# Altium PCB opo8001.PcbDoc
Units mil, origin at the board's own origin, x right, y up, seen from the top; angles counter-clockwise.
Board outline 1424 x 1040 mil, 6 copper layers (Top Layer, Ground Plane, Signal Layer 1, Signal Layer 2, Power Plane, Bottom Layer), stack 57.617 mil thick; 112 components, 83 nets, 429 pads, 145 vias.
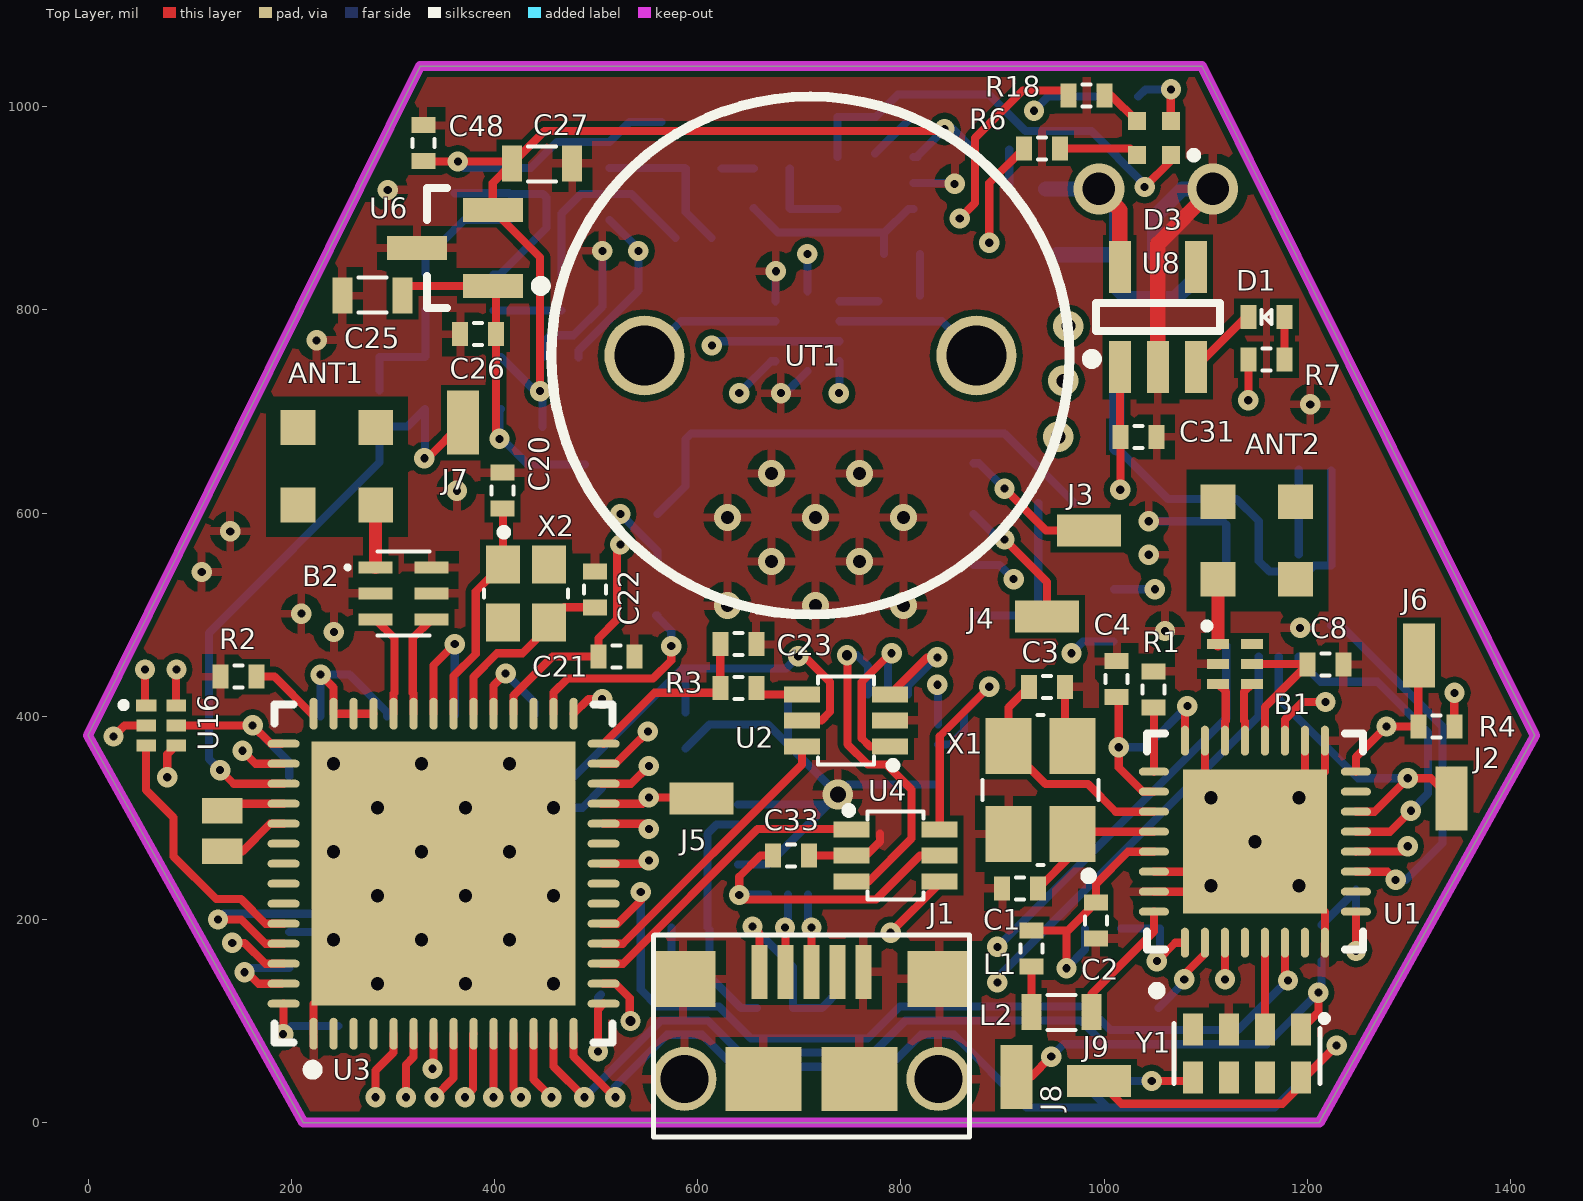
[diagram p0: Top Layer view]
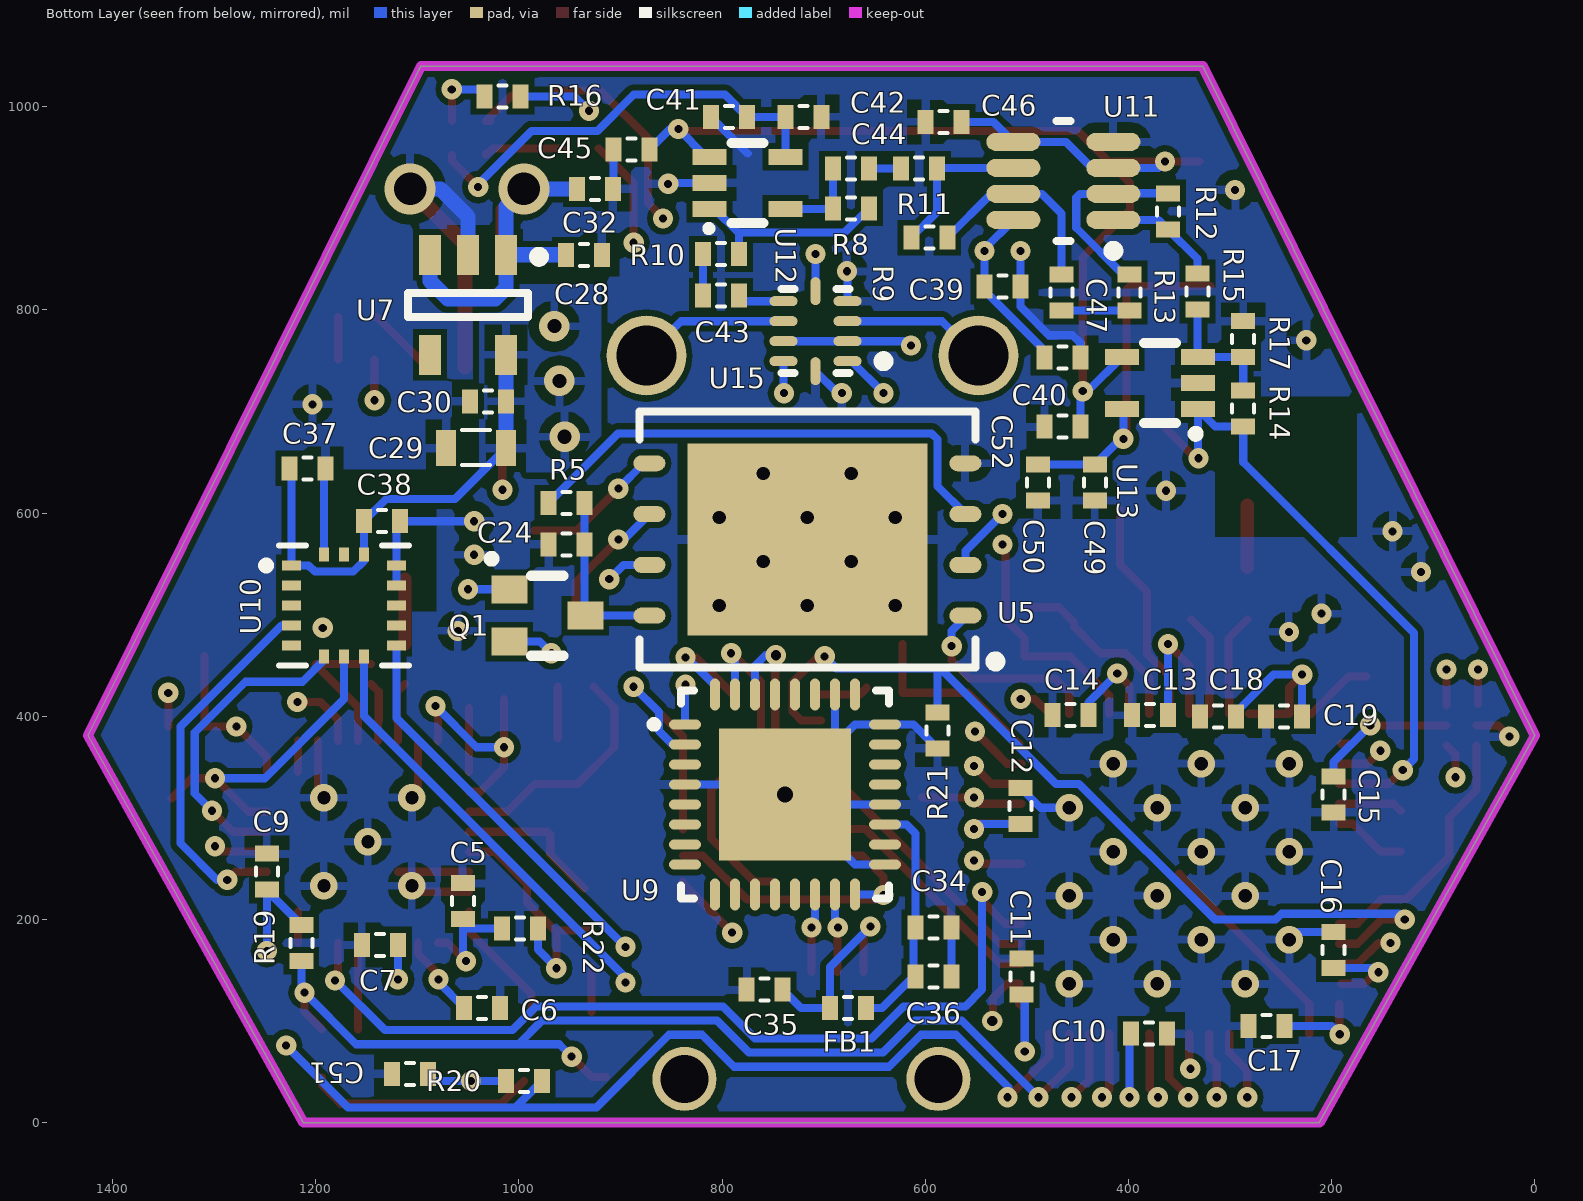
[diagram p1: Bottom Layer view, seen from below]
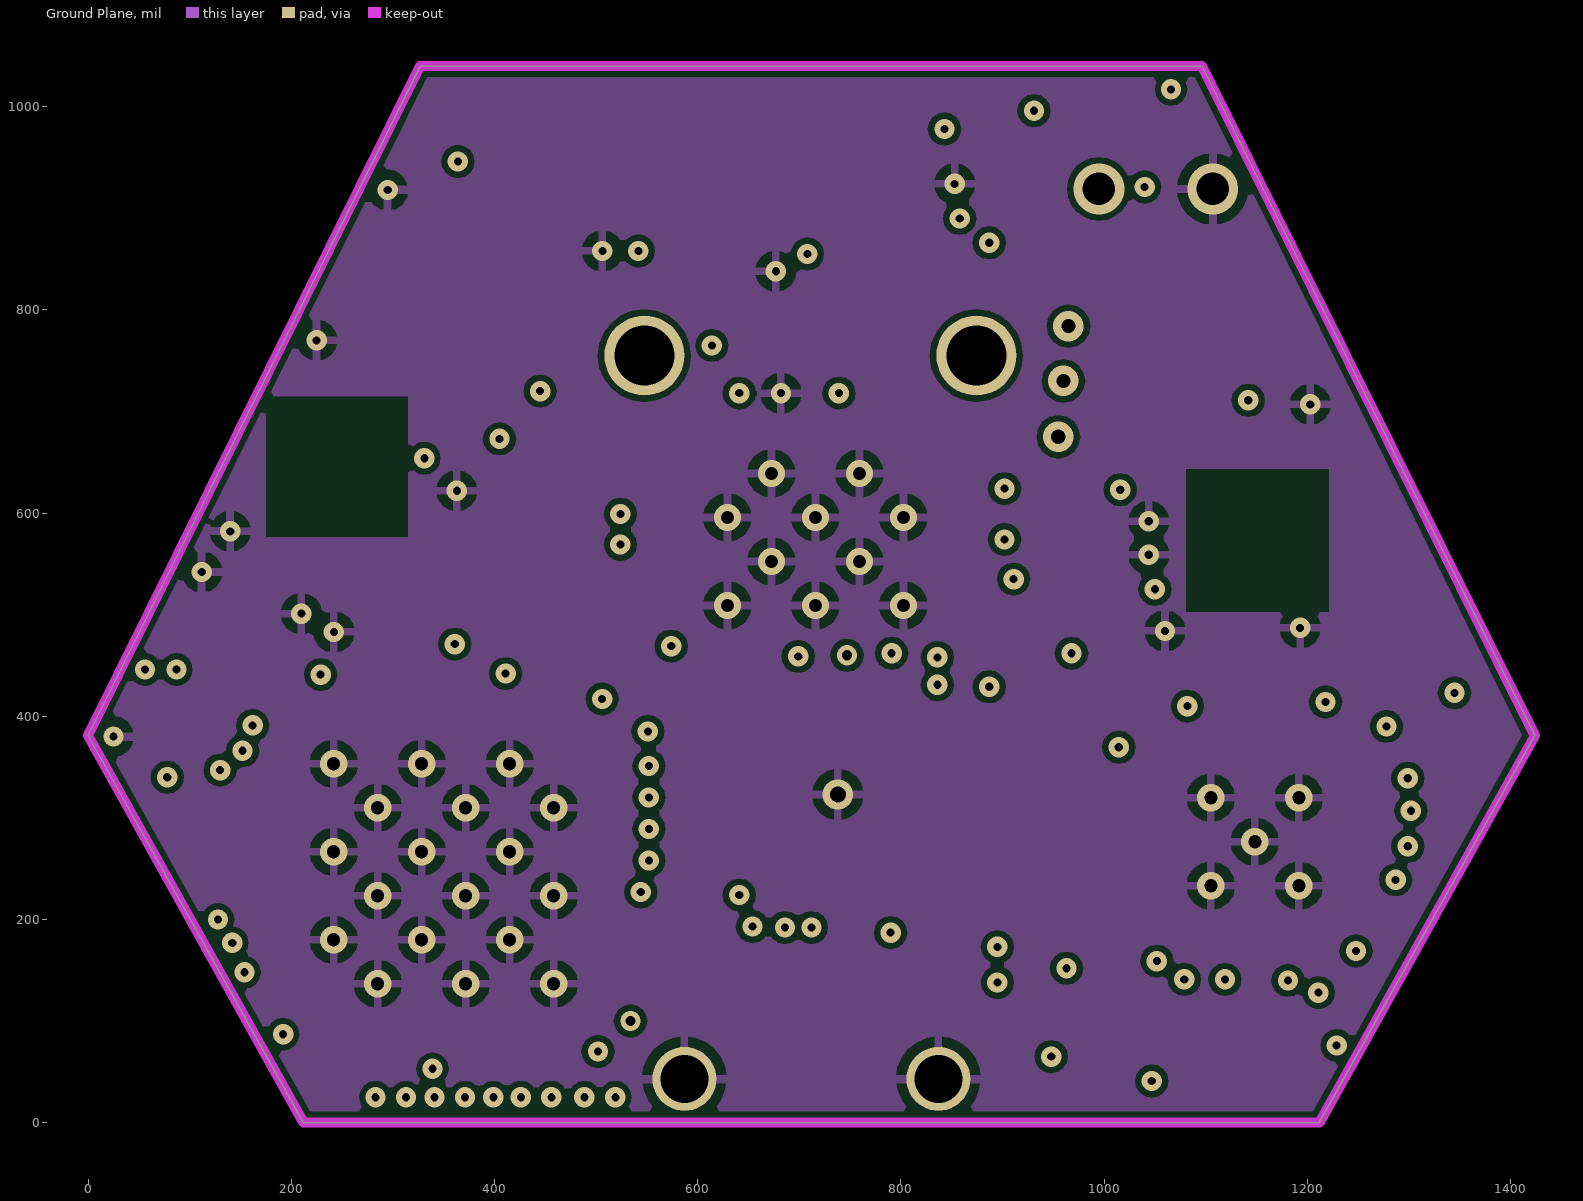
[diagram p2: Ground Plane]
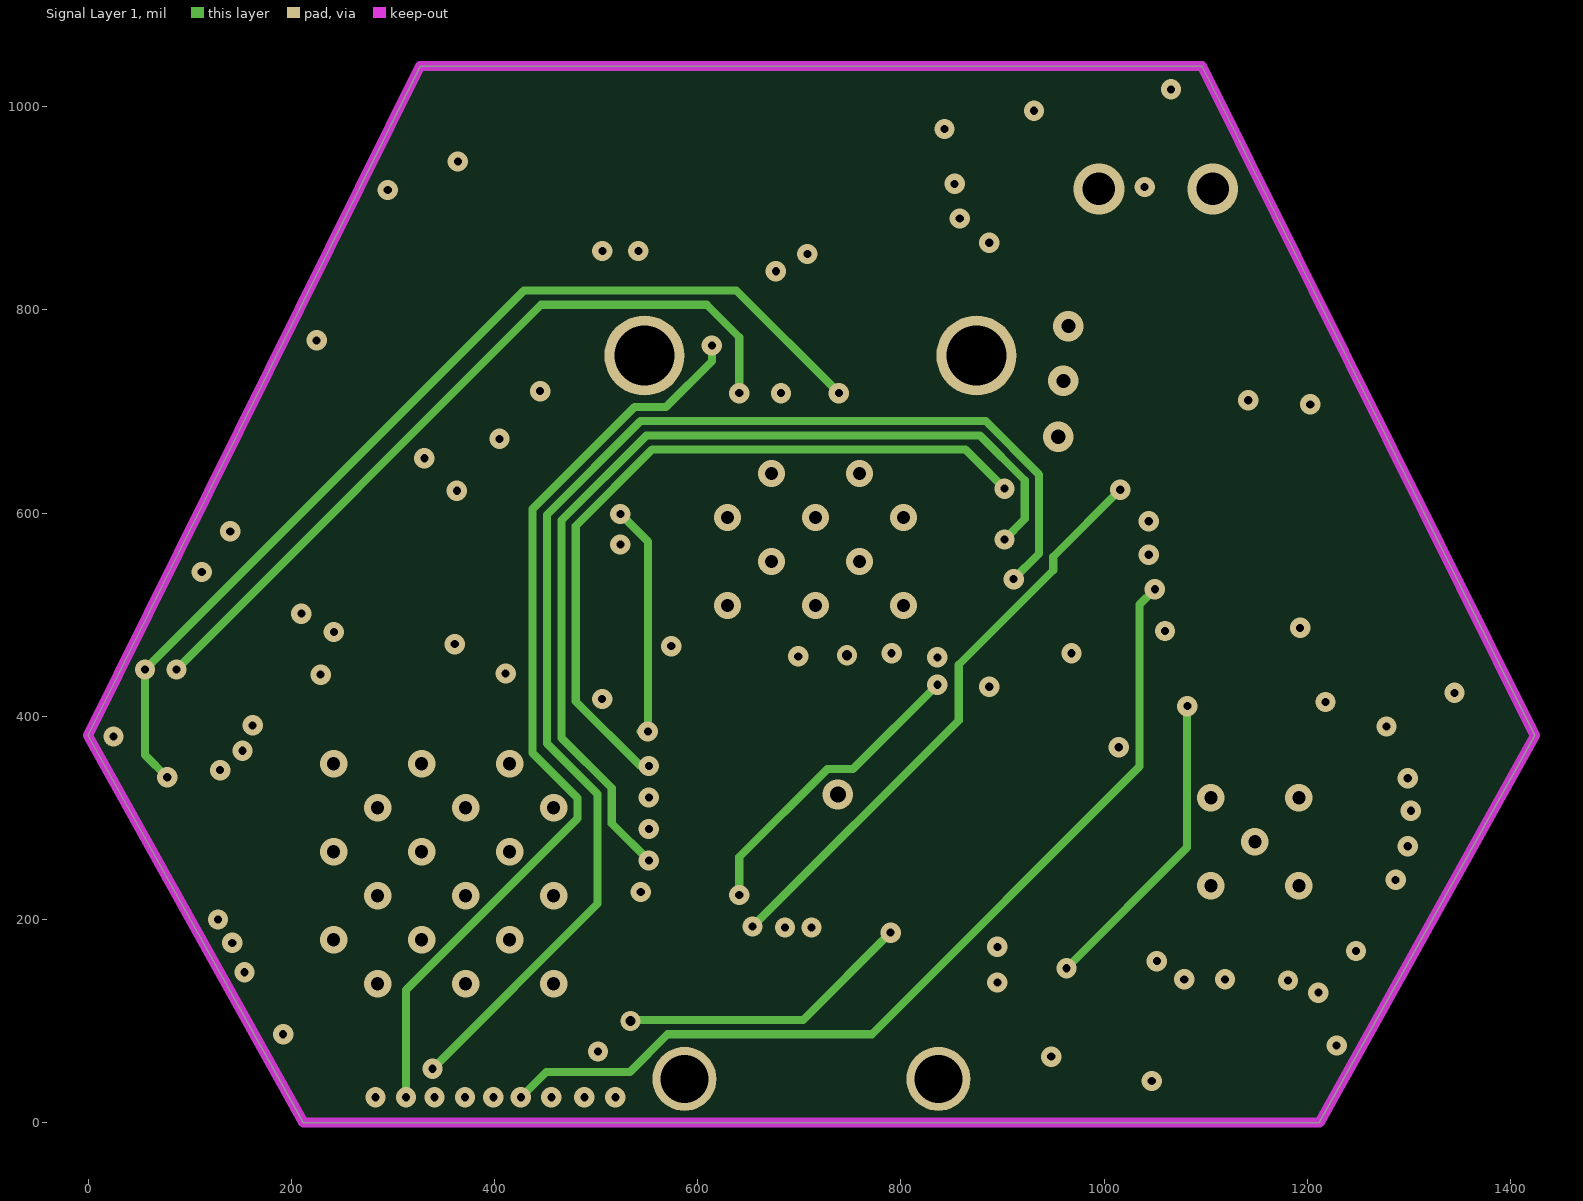
[diagram p3: Signal Layer 1]
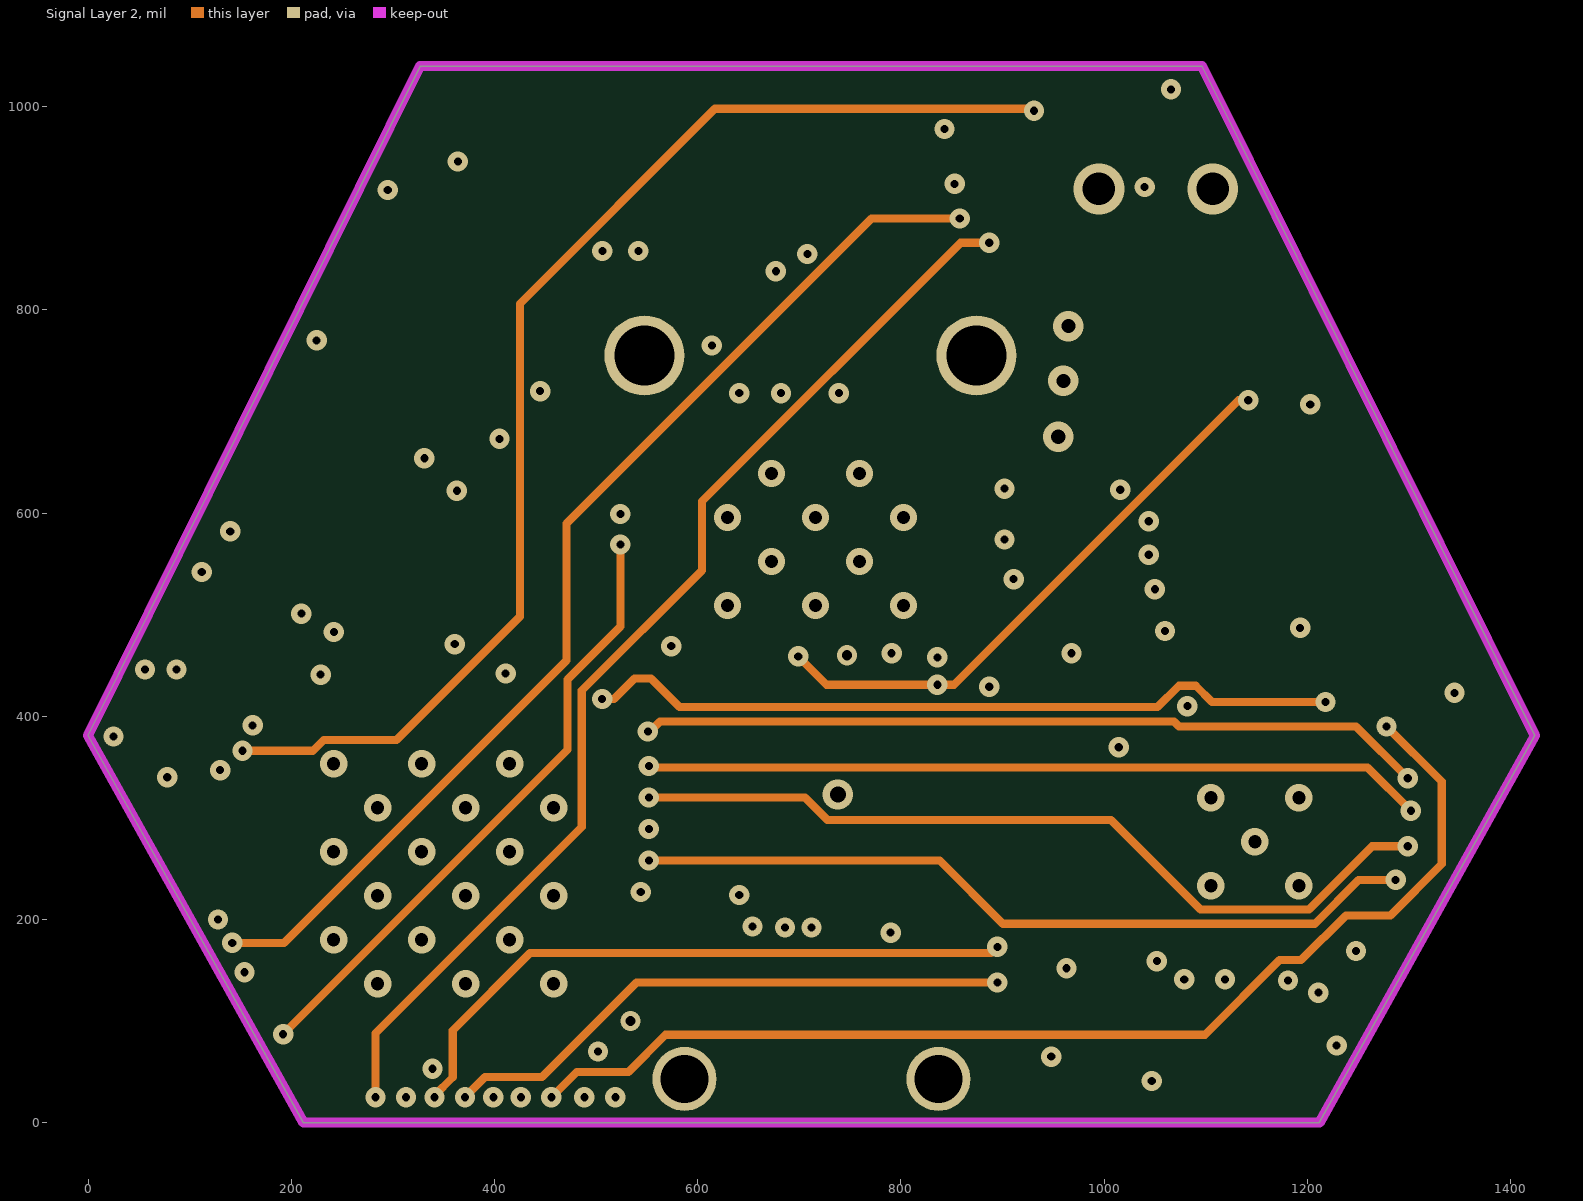
[diagram p4: Signal Layer 2]
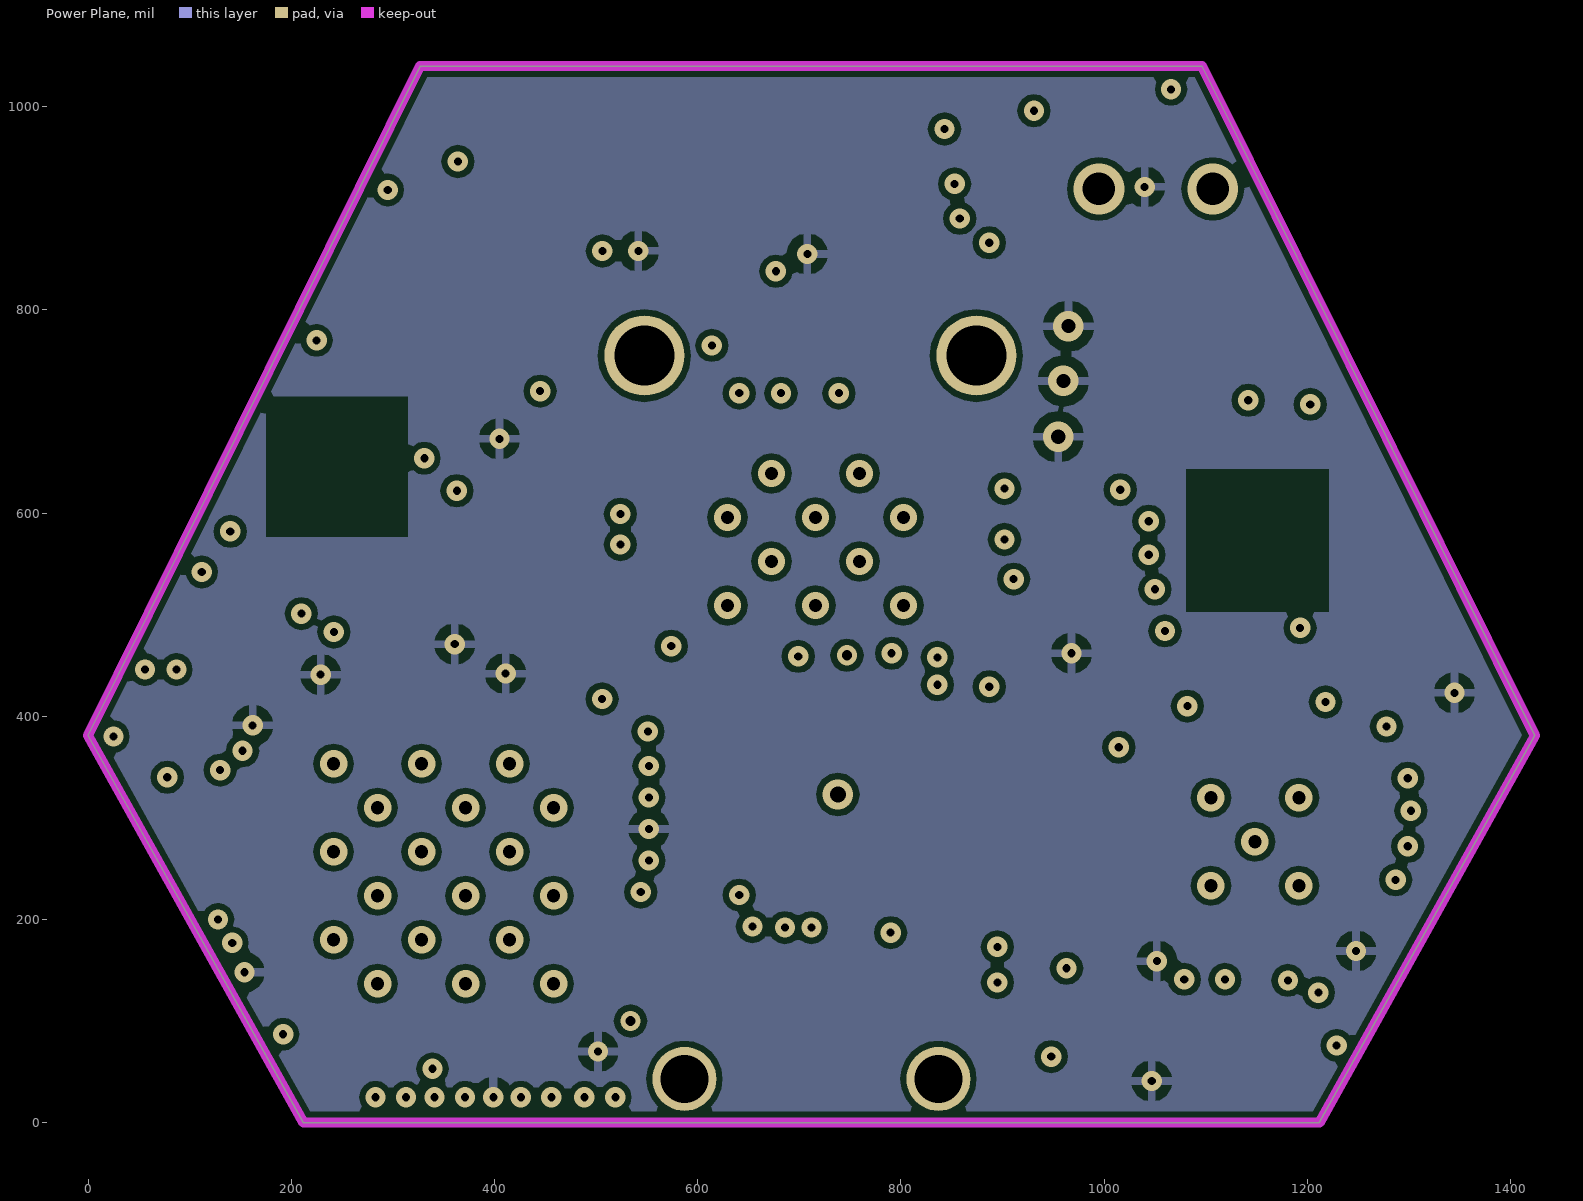
[diagram p5: Power Plane]

## Layer stack, top to bottom
Top Solder: solder mask 0.4, Solder Resist, Dk 3.5
Top Layer: signal copper 1.4
Bonding Ply 1: dielectric 6.4, Dk 4.5
Ground Plane: signal copper 1.4
Laminate Core 1: dielectric 14, FR-4, Dk 4.5
Signal Layer 1: signal copper 1.4
Bonding Ply 2: dielectric 8.4, Dk 4.5
Signal Layer 2: signal copper 1.4
Laminate Core 2: dielectric 14, Dk 4.5
Power Plane: signal copper 1.417
Bonding Ply 3: dielectric 6.4, Dk 4.5
Bottom Layer: signal copper 1.4
Bottom Solder: solder mask 0.4, Solder Resist, Dk 3.5

## Board outline
212,0 1212,0 1424,381 1096.4,1040 326.85,1040 0,381

## Design rules (kind name [scope] priority, off if disabled: settings)
Clearance "Clearance~Sunstone Circuits" [All] p1: gap=6 // Sunstone Circuits Minimum Clearance Rule (MLB~4&6 Layer Designs)
DiffPairsRouting [All] p1: maxlimit=10 minlimit=10 mostfreqgap=10 toplayer_minwidth=8 toplayer_maxwidth=15 toplayer_prefwidth=15 midlayer1_minwidth=8 midlayer1_maxwidth=15 midlayer1_prefwidth=15 midlayer2_minwidth=8 midlayer2_maxwidth=15 midlayer2_prefwidth=15 midlayer3_minwidth=8 midlayer3_maxwidth=15 midlayer3_prefwidth=15 midlayer4_minwidth=8 midlayer4_maxwidth=15 midlayer4_prefwidth=15 bottomlayer_minwidth=8 bottomlayer_maxwidth=15 bottomlayer_prefwidth=15 maxuncoupledlength=500
HoleSize "HoleSize~Sunstone Circuits" [All] p1: absolutevalues=TRUE maxlimit=251 minlimit=8 maxpercent=80.000 minpercent=20.000 // Sunstone Circuits Hole Size Rule (MLB~4&6 Layer Designs)
HoleSize Testpoint [All] p2: absolutevalues=TRUE maxlimit=100 minlimit=1 maxpercent=80.000 minpercent=20.000
HoleSize TestPointUsage [All] p3: absolutevalues=TRUE maxlimit=100 minlimit=1 maxpercent=80.000 minpercent=20.000
MinimumAnnularRing "MinimumAnnularRing~Sunstone Circuits" [All] p1: minimumring=5 // Sunstone Circuits Minimum Annular Ring (MLB~4&6 Layer Designs)
MinimumSolderMaskSliver [All] p1: minsoldermaskwidth=5
PlaneClearance "PlaneClearance~Sunstone Circuits" [All] p1: clearance=12 // Sunstone Circuits Power Plane Clearance Rule (MLB~4&6 Layer Designs)
PlaneConnect "PlaneConnect~Sunstone Circuits" [All] p1: planeconnectstyle=Relief reliefexpansion=10 reliefentries=4 reliefconductorwidth=8 reliefairgap=10 // Sunstone Circuits Power Plane Connect Rule (MLB~4&6 Layer Designs)
PolygonConnect "PolygonConnect~Sunstone Circuits" [All] p1: connectstyle=Relief reliefconductorwidth=8 reliefentries=4 polygonreliefangle="90 Angle" airgapwidth=10 // Sunstone Circuits Polygon Connect Style (MLB~4&6 Layer Designs)
RoutingVias "RoutingVias~Sunstone Circuits" [All] p1: holewidth=16 width=30 viastyle="Through Hole" minholewidth=8 minwidth=24 maxholewidth=20 maxwidth=40 // Sunstone Circuits Routing Vias Rule (MLB~4&6 Layer Designs)
ShortCircuit "ShortCircuit~Sunstone Circuits" [All] p1: allowed=FALSE // Sunstone Circuits Short Circuit Rule~Do Not Allow (MLB~4&6 Layer Designs)
SilkToSilkClearance [All] p1: silktosilkclearance=5
SilkToSolderMaskClearance [IsPad] p1 off: minsilkscreentomaskgap=5 clearancetoexposedcopper=TRUE
SolderMaskExpansion "SolderMaskExpansion~Sunstone Circuits" [All] p1: expansion=3 // Sunstone Circuits Solder Mask Expansion Rule (MLB~4&6 Layer Designs)
ViasUnderSMD "ViasUnderSMD~Sunstone Circuits" [All] p1: allowed=FALSE // Sunstone Circuits Vias Under SMD~Do Not Allow (MLB~4&6 Layer Designs)
Width "Width~Sunstone Circuits" [All] p1: maxlimit=100 minlimit=6 preferedwidth=10 // Sunstone Circuits Minimum Width Rule (MLB~4&6 Layer Designs)
22 further rules are at their usual default settings.

## Classes and differential pairs
component class bluetooth: ANT2 B1 C1 C2 C3 C4 C5 C6 C7 C8 C9 L1 L2 R1 R4 R22 U1 X1
component class mcu: ANT1 B2 C10 C11 C12 C13 C14 C15 C16 C17 C18 C19 C20 C21 C22 C23 C24 D3 J2 J3 J4 J5 J6 Q1 R2 R3 R5 R6 R16 R18 U3 U5 X2
component class power: C28 C29 C30 U7
component class programmer_charger: C31 C32 C33 C34 C35 C36 D1 FB1 J1 R7 R21 U2 U4 U8 U9
component class rtc_accel: C37 C38 C51 J8 J9 R19 R20 U10 Y1
component class ul_rx: C25 C26 C27 C39 C40 C41 C42 C43 C44 C45 C46 C47 C48 C49 C50 C52 J7 R8 R9 R10 R11 R12 R13 R14 R15 R17 U6 U11 U12 U13
component class ul_tx_ctrl: U15 U16 UT1
differential pair USB_D: +USB_D_P -USB_D_N
differential pair BLE_ANT: +BLE_ANT_P -BLE_ANT_N
differential pair RF: +RF_P -RF_N

## Components (designator, comment, footprint, x,y, rotation, side; value= is the part's Value field where it differs from the comment)
ANT1 "Ground Antenna" "SMD Ground Antenna" 245,646 r90 top
ANT2 "Ground Antenna" "SMD Ground Antenna" 1150.3,573 r0 top
B1 "2450BM14A0002" 2450BM14A0002 1128.84,451.53 r90 top
B2 "BALUN" 2450BM15A0002 310.61,521 r0 top
C1 "15pF 0402 ceramic cap" 0402 917.53,230.53 r180 top
C2 "Ceramic capacitor" 0402 992,199 r270 top
C3 "15pF 0402 ceramic cap" 0402 944,429 r180 top
C4 "Ceramic capacitor" 0402 1012.53,436.53 r90 top
C5 "4.7uF" 0402 1055,218 r90 bottom
C6 "Ceramic capacitor" 0402 1036,113 r180 bottom
C7 "33 nF Cap" 0402 1136.72,175 r0 bottom
C8 "2.2nF Cap" 0402 1218,451 r0 top
C9 "Ceramic capacitor" 0402 1247.94,247 r90 bottom
C10 "Ceramic capacitor" 0402 379.53,87.52 r180 bottom
C11 "Ceramic capacitor" 0402 505,144 r90 bottom
C12 "Ceramic capacitor" 0402 506,311.72 r90 bottom
C13 "Ceramic capacitor" 0402 378.72,401 r0 bottom
C14 "Ceramic capacitor" 0402 457,401 r0 bottom
C15 "Ceramic capacitor" 0402 198,323 r270 bottom
C16 "Ceramic capacitor" 0402 198,170 r90 bottom
C17 "Ceramic capacitor" 0402 264,95 r0 bottom
C18 "Ceramic capacitor" 0402 312,400 r0 bottom
C19 "220pF 0402 ceramic cap" 0402 246.72,400 r0 bottom
C20 "13pf 0402 Cap" 0402 408,622 r90 top
C21 "Ceramic capacitor" 0402 520,459 r0 top
C22 "13pf 0402 Cap" 0402 499,525 r270 top
C23 "Ceramic capacitor" 0402 640,471 r0 top
C24 "Ceramic capacitor" 0402 953,569 r180 bottom
C25 "Ceramic capacitor" 0603 280,814 r180 top
C26 "Ceramic capacitor" 0402 384,776 r180 top
C27 "Ceramic capacitor" 0603 447,944 r0 top
C28 "Ceramic capacitor" 0402 936,854.21 r180 bottom
C29 "Ceramic capacitor" 0603 1042.13,664 r0 bottom
C30 "Ceramic capacitor" 0402 1030.31,710 r0 bottom
C31 "Ceramic capacitor" 0402 1034,675 r0 top
C32 "Ceramic capacitor" 0402 925,919 r180 bottom
C33 "Ceramic capacitor" 0402 692,263 r0 top
C34 "Tantalum capacitor" 0402 592,192 r180 bottom
C35 "Ceramic capacitor" 0402 758,131 r0 bottom
C36 "Ceramic capacitor" 0402 592,144 r180 bottom
C37 "Ceramic capacitor" 0402 1208,644 r180 bottom
C38 "Ceramic capacitor" 0402 1134.59,592 r180 bottom
C39 "Ceramic capacitor" 0402 524,823 r180 bottom
C40 "Ceramic capacitor" 0402 465,753 r180 bottom
C41 "Ceramic capacitor" 0402 793,990 r0 bottom
C42 "Ceramic capacitor" 0402 720,990 r180 bottom
C43 "Ceramic capacitor" 0402 801,814 r0 bottom
C44 "Ceramic capacitor" 0402 673,939 r180 bottom
C45 "Ceramic capacitor" 0402 889,958 r0 bottom
C46 "Ceramic capacitor" 0402 582,985 r0 bottom
C47 "Ceramic capacitor" 0402 466,817 r270 bottom
C48 "Ceramic capacitor" 0402 330,964 r90 top
C49 "Ceramic capacitor" 0402 433,630 r270 bottom
C50 "Ceramic capacitor" 0402 489,630 r270 bottom
C51 "Ceramic capacitor" 0402 1107,48 r0 bottom
C52 "Ceramic capacitor" 0402 465,685 r0 bottom
D1 "LED, Green" "0402 - DIODE" 1160,793 r180 top
D3 "Tri Color LED" 0404 1049,969 r180 top
FB1 "Ferrite Bead" 0402 676,113 r0 bottom
J1 "micro USB-B" "Micro USB-B" 712,43 r0 top
J2 "RCU 0603 SMD Testpoint" RCU_0603 1342,319 r0 top
J3 "RCU 0603 SMD Testpoint" RCU_0603 985,583 r90 top
J4 "RCU 0603 SMD Testpoint" RCU_0603 944,498 r90 top
J5 "RCU 0603 SMD Testpoint" RCU_0603 604,319 r90 top
J6 "RCU 0603 SMD Testpoint" RCU_0603 1310,460 r0 top
J7 "RCU 0603 SMD Testpoint" RCU_0603 369,689 r0 top
J8 "RCU 0603 SMD Testpoint" RCU_0603 914,45 r180 top
J9 "RCU 0603 SMD Testpoint" RCU_0603 995,41 r270 top
L1 "15nH chip inductor" 0402 928.53,171.53 r270 top
L2 "10uH chip inductor" 0603 958,109 r0 top
Q1 "DMG1013UW" SC70-3 972,499 r270 bottom
R1 "22k 0402 resistor" 0402 1048.53,426.53 r90 top
R2 "56k 0402 Res" 0402 148,439 r180 top
R3 "Chip resistor" 0402 640,428 r0 top
R4 "Chip resistor" 0402 1327,390 r0 top
R5 "Chip resistor" 0402 953,610 r0 bottom
R6 "Chip resistor" 0402 939,959 r180 top
R7 "Chip resistor" 0402 1160,751 r0 top
R8 "Chip resistor" 0402 673,900 r0 bottom
R9 "Chip resistor" 0402 596,871 r180 bottom
R10 "Chip resistor" 0402 801,855 r180 bottom
R11 "Chip resistor" 0402 606,939 r180 bottom
R12 "Chip resistor" 0402 361,897 r270 bottom
R13 "Chip resistor" 0402 399,817 r270 bottom
R14 "Chip resistor" 0402 287,703 r270 bottom
R15 "Chip resistor" 0402 332,818 r270 bottom
R16 "Chip resistor" 0402 1016,1010 r180 bottom
R17 "Chip resistor" 0402 287,771.31 r90 bottom
R18 "Chip resistor" 0402 983,1011 r180 top
R19 "20k Resistor" 0402 1214,177 r270 bottom
R20 "20k Resistor" 0402 995,41 r180 bottom
R21 "56k 0402 Res" 0402 588,386 r270 bottom
R22 "Chip resistor" 0402 999,191 r180 bottom
U1 "nrf8001" QFN50P500X500X90_HS-33N 1148.53,276.53 r90 top
U2 "NC7WZ17" SC-70-6 746,396 r90 top
U3 "cc2538" QFN50P800X800X100_HS-57N 350,245 r90 top
U4 "NC7WZ17" SC-70-6 795,263 r270 top
U5 "SST25VF064C" WSON 716,574 r0 bottom
U6 "ISL60002" SOT23-3N 361,861 r180 top
U7 "ADP162" TSOT23-5 1050,805 r270 bottom
U8 "MAX1555" SOT23-5 1053,793 r90 top
U9 "FT232RQ" QFN-32 738,323 r180 bottom
U10 "ADXL362" LGA_CC-16-4 1172,509 r180 bottom
U11 "MIC863" TSOP65P280X145-8N 464,927 r0 bottom
U12 "MIC861" SC70-5 775,925 r270 bottom
U13 "TS881" SC70-5 369,728 r90 bottom
U15 "NX3L4684" QFN50P155X200X13-10N 708,779 r0 bottom
U16 "NC7WZ14L6X" NC7WZ14L6X 72,391 r270 top
UT1 "PT120" PT120 711,755 r0 top
X1 "16MHz Crystal" TSX-3225 937.53,327.53 r90 top
X2 "32 MHz Crystal" FA-128 431,521 r270 top
Y1 "RV-4162-C7" RV4162 1140.65,68 r180 top

## Footprints (in the part's own frame and the unit in brackets; to place one, negate y for a bottom-side part, rotate by r counter-clockwise, add the part's x,y. Pads: shape width x height; smd on the part's side, far side on the other; paste and mask are expansions set on the pad)
0402 [mm] "2-Leads, Body 1.00x0.50mm, IPC Medium Density"
  rect 0.4x0.6 smd: 1(-0.45,0) 2(0.45,0)
  silkscreen extent -0.1,-0.28 0.1,0.28, body extent -0.53,-0.28 0.53,0.27, height 0.4
"0402 - DIODE" [mm] "2-Leads, Body 1.00x0.50mm, IPC Medium Density"
  rect 0.4x0.6 smd: 1(-0.45,0) 2(0.45,0)
  silkscreen extent -0.13,-0.18 0.13,0.18, body extent -0.53,-0.28 0.53,0.27, height 0.4
0404 [mm]
  rect 0.45x0.45 smd: 1(-0.425,0.425) 2(0.425,0.425) 3(0.425,-0.425) 4(-0.425,-0.425)
  silkscreen extent -1.06,0.37 -0.94,0.48, body extent -0.5,-0.5 0.5,0.5, height 0.2
0603 [mm] "2-Leads, Body 1.55x0.85mm, IPC Medium Density"
  rect 0.5x0.9 smd: 1(-0.75,0) 2(0.75,0)
  silkscreen extent -0.35,-0.45 0.35,0.43, body extent -0.75,-0.42 0.75,0.43, height 0.5
2450BM14A0002 [mm]
  rect 0.25x0.55 smd: 1(0.5,0.425) 2(0,0.425) 3(-0.5,0.425) 4(-0.5,-0.425) 5(0,-0.425) 6(0.5,-0.425)
  silkscreen extent 0.91,0.66 0.99,0.74, body extent -0.8,-0.4 0.8,0.4, height 0.6
2450BM15A0002 [mm] "Chip Array, Flat, 6-Leads, Pitch 0.65mm,  Body 2.00x1.25mm,  IPC Medium Density"
  rect 0.85x0.3 smd: 1(-0.7,0.65) 2(-0.7,0) 3(-0.7,-0.65) 4(0.7,-0.65) 5(0.7,0) 6(0.7,0.65)
  silkscreen extent -1.45,-1.05 0.65,1.05, body extent -0.67,-1.05 0.67,1.05, height 0.81
FA-128 [mm]
  rect 0.95x0.85 smd: 1(-0.725,-0.575) 2(0.725,-0.575) 3(0.725,0.575) 4(-0.725,0.575)
  silkscreen extent -1.58,-1.05 0.1,1.05, body extent -1,-0.8 1,0.8, height 0.5
LGA_CC-16-4 [mm]
  rect 0.475x0.25 smd: 1(-1.313,1) 2(-1.313,0.5) 3(-1.313,0) 4(-1.313,-0.5) 5(-1.313,-1) 9(1.313,-1) 10(1.313,-0.5) 11(1.313,0) 12(1.313,0.5) 13(1.313,1)
  rect 0.25x0.35 smd: 6(-0.5,-1.275) 7(0,-1.275) 8(0.5,-1.275) 14(0.5,1.275) 15(0,1.275) 16(-0.5,1.275)
  silkscreen extent -2.02,-1.5 1.63,1.5, body extent -1.63,-1.5 1.63,1.5, height 1.15
"Micro USB-B" [mm]
  rect 0.4x1.35 smd mask+0.1: 1(-1.3,2.675) 2(-0.65,2.675) 3(0,2.675) 4(0.65,2.675) 5(1.3,2.675)
  rect 1.6x1.4 smd mask+0.1: 6(-3.2,2.5) 6(3.2,2.5)
  round 1.6 hole 1.2: 6(-3.175,0) 6(3.175,0)
  rect 1.9x1.6 smd mask+0.1: 6(-1.2,0) 6(1.2,0)
  silkscreen extent -3.95,-1.45 3.95,3.6, body extent -4.1,-2.54 4.1,2.89, height 2.68
NC7WZ14L6X [mm]
  rect 0.3x0.52 smd: 1(-0.5,-0.375)
  rect 0.3x0.49 smd: 2(0,-0.375) 3(0.5,-0.375) 4(0.5,0.375) 5(0,0.375) 6(-0.5,0.375)
  body extent -0.72,-0.5 0.72,0.5, height 0.55
PT120 [mm]
  round 2 hole 1.5: 1(-4.15,0) 2(4.15,0)
  silkscreen extent -6.48,-6.48 6.48,6.48, body extent -6.45,-6.49 6.5,6.49, height 14
QFN50P155X200X13-10N [mm] "QFN, 10-Leads, Body 2.1x1.6mm (max), Pitch 0.50mm, IPC Medium Density"
  oval 0.7x0.25 smd: 1(-0.8,0.75) 2(-0.8,0.25) 3(-0.8,-0.25) 4(-0.8,-0.75) 6(0.8,-0.75) 7(0.8,-0.25) 8(0.8,0.25) 9(0.8,0.75)
  oval 0.25x0.7 smd: 5(0,-1) 10(0,1)
  silkscreen extent -1.82,-1.05 0.85,1.05, body extent -0.83,-1.05 0.82,1.05, height 0.13
QFN50P500X500X90_HS-33N [mm] "QFN, 32-Leads, Body 5.00x5.00mm, Pitch 0.50mm, Thermal Pad 3.60x3.60mm, IPC Medium Density"
  oval 0.75x0.2 smd: 1(-2.525,1.75) 2(-2.525,1.25) 3(-2.525,0.75) 4(-2.525,0.25) 5(-2.525,-0.25) 6(-2.525,-0.75) 7(-2.525,-1.25) 8(-2.525,-1.75) 17(2.525,-1.75) 18(2.525,-1.25) 19(2.525,-0.75) 20(2.525,-0.25) 21(2.525,0.25) 22(2.525,0.75) 23(2.525,1.25) 24(2.525,1.75)
  oval 0.2x0.75 smd: 9(-1.75,-2.525) 10(-1.25,-2.525) 11(-0.75,-2.525) 12(-0.25,-2.525) 13(0.25,-2.525) 14(0.75,-2.525) 15(1.25,-2.525) 16(1.75,-2.525) 25(1.75,2.525) 26(1.25,2.525) 27(0.75,2.525) 28(0.25,2.525) 29(-0.25,2.525) 30(-0.75,2.525) 31(-1.25,2.525) 32(-1.75,2.525)
  rect 3.6x3.6 smd: 33(0,0)
  silkscreen extent -2.7,-2.7 2.7,2.7, body extent -2.55,-2.55 2.55,2.55, height 0.9
QFN50P800X800X100_HS-57N [mm] "QFN, 56-Leads, Body 8.00x8.00mm, Pitch 0.50mm, Thermal Pad 6.60x6.60mm, IPC Medium Density"
  oval 0.8x0.2 smd: 1(-4,3.25) 2(-4,2.75) 3(-4,2.25) 4(-4,1.75) 5(-4,1.25) 6(-4,0.75) 7(-4,0.25) 8(-4,-0.25) 9(-4,-0.75) 10(-4,-1.25) 11(-4,-1.75) 12(-4,-2.25) 13(-4,-2.75) 14(-4,-3.25) 29(4,-3.25) 30(4,-2.75) 31(4,-2.25) 32(4,-1.75) 33(4,-1.25) 34(4,-0.75) 35(4,-0.25) 36(4,0.25) 37(4,0.75) 38(4,1.25) 39(4,1.75) 40(4,2.25) 41(4,2.75) 42(4,3.25)
  oval 0.2x0.8 smd: 15(-3.25,-4) 16(-2.75,-4) 17(-2.25,-4) 18(-1.75,-4) 19(-1.25,-4) 20(-0.75,-4) 21(-0.25,-4) 22(0.25,-4) 23(0.75,-4) 24(1.25,-4) 25(1.75,-4) 26(2.25,-4) 27(2.75,-4) 28(3.25,-4) 43(3.25,4) 44(2.75,4) 45(2.25,4) 46(1.75,4) 47(1.25,4) 48(0.75,4) 49(0.25,4) 50(-0.25,4) 51(-0.75,4) 52(-1.25,4) 53(-1.75,4) 54(-2.25,4) 55(-2.75,4) 56(-3.25,4)
  rect 6.6x6.6 smd: 57(0,0)
  silkscreen extent -5.02,-4.23 4.23,4.23, body extent -4.08,-4.08 4.08,4.08, height 1
QFN-32 [mm] "32-Pin QFN 0.5 mm Pitch"
  oval 0.8x0.25 smd: 1(-2.5,1.75) 2(-2.5,1.25) 3(-2.5,0.75) 4(-2.5,0.25) 5(-2.5,-0.25) 6(-2.5,-0.75) 7(-2.5,-1.25) 8(-2.5,-1.75) 17(2.5,-1.75) 18(2.5,-1.25) 19(2.5,-0.75) 20(2.5,-0.25) 21(2.5,0.25) 22(2.5,0.75) 23(2.5,1.25) 24(2.5,1.75)
  oval 0.25x0.8 smd: 9(-1.75,-2.5) 10(-1.25,-2.5) 11(-0.75,-2.5) 12(-0.25,-2.5) 13(0.25,-2.5) 14(0.75,-2.5) 15(1.25,-2.5) 16(1.75,-2.5) 25(1.75,2.5) 26(1.25,2.5) 27(0.75,2.5) 28(0.25,2.5) 29(-0.25,2.5) 30(-0.75,2.5) 31(-1.25,2.5) 32(-1.75,2.5)
  rect 3.3x3.3 smd: 33(0,0)
  silkscreen extent -2.6,-2.6 2.6,2.6, body extent -2.58,-2.58 2.58,2.58, height 0.8
RCU_0603 [mm]
  rect 0.8x1.6 smd: 1(0,0)
  body extent -0.41,-0.81 0.41,0.81, height 1.5
RV4162 [mm] "RTC"
  rect 0.5x0.8 smd: 1(-1.35,-0.6) 2(-0.45,-0.6) 3(0.45,-0.6) 4(1.35,-0.6) 5(1.35,0.6) 6(0.45,0.6) 7(-0.45,0.6) 8(-1.35,0.6)
  silkscreen extent -1.97,-0.91 1.83,0.75, body extent -1.6,-0.75 1.6,0.75, height 0.8
SC70-3 [mm]
  rect 0.7x0.9 smd: 1(-0.65,-0.95) 2(0.65,-0.95) 3(0,0.95)
  silkscreen extent -1,-0.4 1,0.4, body extent -0.9,-0.6 0.9,0.6, height 0.8
SC70-5 [mm]
  rect 0.4x0.85 smd: 1(-0.65,-0.95) 2(0,-0.95) 3(0.65,-0.95) 4(0.65,0.95) 5(-0.65,0.95)
  silkscreen extent -1,-0.4 1,0.4, body extent -0.9,-0.6 0.9,0.6, height 0.8
SC-70-6 [mm]
  rect 0.4x0.9 smd mask+0.05: 1(-0.65,-1.1) 2(0,-1.1) 3(0.65,-1.1) 4(0.65,1.1) 5(0,1.1) 6(-0.65,1.1)
  silkscreen extent -1.18,-1.23 1.1,0.7, body extent -1.1,-0.7 1.1,0.7, height 1.1
"SMD Ground Antenna" [mm] "0479480001"
  rect 0.87x0.87 smd mask+0.335: 1(-0.97,-0.97) 2(0.97,-0.97) 3(0.97,0.97) 4(-0.97,0.97)
  body extent -1.5,-1.5 1.5,1.5, height 4
SOT23-3N [mm] "SOT23, 3-Leads, Body 2.9x1.3mm, Pitch 0.95mm, Lead Span 2.5mm, IPC Medium Density"
  rect 1.5x0.6 smd: 1(-0.95,0.95) 2(-0.95,-0.95) 3(0.95,0)
  silkscreen extent -2.28,-1.5 0.7,1.5, body extent -0.7,-1.5 0.7,1.5, height 1.1
SOT23-5 [mm] "SOT23, 5-Leads, Body 2.9x1.6mm, Pitch 0.95mm, Lead Span 2.8mm, IPC High Density"
  rect 1.3x0.55 smd: 1(-1.25,0.95) 2(-1.25,0) 3(-1.25,-0.95) 4(1.25,-0.95) 5(1.25,0.95)
  silkscreen extent -1.17,-1.55 0.35,1.77, body extent -0.67,-1.5 0.65,1.5, height 1.45
TSOP65P280X145-8N [mm] "TSOP, 8-Leads, Body 2.90x1.60mm, Pitch 0.65mm, IPC Medium Density"
  oval 1.35x0.45 smd: 1(-1.25,0.975) 2(-1.25,0.325) 3(-1.25,-0.325) 4(-1.25,-0.975) 5(1.25,-0.975) 6(1.25,-0.325) 7(1.25,0.325) 8(1.25,0.975)
  silkscreen extent -1.37,-1.5 0.18,1.87, body extent -0.85,-1.5 0.85,1.5, height 1.45
TSOT23-5 [mm] "SOT23, 6-Leads, Body 3.0x2.9mm (max), Pitch 0.95mm, IPC Medium Density"
  rect 1x0.55 smd: 1(-1.25,0.95) 2(-1.25,0) 3(-1.25,-0.95) 4(1.25,-0.95) 5(1.25,0.95)
  silkscreen extent -1.32,-1.5 0.3,1.9, body extent -0.87,-1.5 0.87,1.5, height 1
TSX-3225 [mm]
  rect 1.4x1.15 smd: 1(-1.1,-0.8) 2(1.1,-0.8) 3(1.1,0.8) 4(-1.1,0.8)
  silkscreen extent -2.23,-1.45 1.88,1.45, body extent -1.6,-1.25 1.6,1.25, height 0.6
WSON [mm] "QFN, 8-Leads, Body 8.00x6.00mm, Pitch 1.27mm, Thermal Pad 6.00x4.80mm, IPC Medium Density"
  oval 0.8x0.4 smd: 1(-3.95,1.905) 2(-3.95,0.635) 3(-3.95,-0.635) 4(-3.95,-1.905) 5(3.95,-1.905) 6(3.95,-0.635) 7(3.95,0.635) 8(3.95,1.905)
  rect 6x4.8 smd: 9(0,0)
  silkscreen extent -4.82,-3.2 4.2,3.2, body extent -4.05,-3.05 4.05,3.05, height 0.8

## Part data
ANT1 ANT2: library part "Molex Antenna", "Molex 2.4 GHz SMD On-Ground Antenna"
B1: library part nrf8001_balun, "nrf8001 chip balun"
B2: library part cc2538_Balun, "Johanson CC253X Balun"
C1 C3: library part C_15p_0402_ceramic, "15pF, 2%, NP0, 0402"
C2 C16 C17 C21 C28 C30 C31 C32 C43 C51: library part C_1u_0402_ceramic, "Ceramic capacitor, 1 uF, 0402 package"
C4 C23: library part C_1000p_0402_ceramic, "Ceramic capacitor, 1000 pF, 0402 package"
C5: library part C_4.7u_0402_ceramic, "4.7 uF 10% 0402 6.3V X5R ceramic cap"
C6 C9 C10 C11 C12 C13 C14 C15 C18 C24 C26 C33 C35 C36 C37 C38 C39 C41 C45 C46 C48 C49 C52: library part C_0.1u_0402_ceramic, "Ceramic capacitor, 0.1u, 0402 package"
C7: library part C_0.033uF_0402_ceramic, "33nF 10% 0402 16V X7R ceramic cap"
C8: library part C_2.2n_0402_ceramic, "2.2nF 10% 50V X7R ceramic cap"
C19: library part C_220pf_0402_ceramic, "220pF 5% 50 V C0G NP0 0402 ceramic cap"
C20 C22: library part C_13p_0402, "13pf, 50V, 2%, c0G, NP0, 0402, ceramic"
C25 C27 C29: library part C_10u_0603_ceramic, "Ceramic capacitor, 10 uF, 0603 package"
C34: library part C_4.7u_0402_tantalum, "Tantalum capacitor, 4.7 uF, 0402 package"
C40 C42 C50: library part C_10u_0402_ceramic, "Ceramic capacitor, 10 uF, 0402 package"
C44 C47: library part C_47p_0402_ceramic, "Ceramic capacitor, 47 pF, 0402 package"
D1: library part D_LED_GREEN_0402, "LED, Green,  0402"
D3: library part D_LED_RGB_0404, "LED, RGB, 0404"
FB1: library part FB_150mA_0402, "Ferrite Bead, 150 mA, 0402 package"
J1: library part "Micro USB", "CONN USB MICRO B RECPT SMT R/A"
J2 J3 J4 J5 J6 J7 J8 J9: library part Testpoint-0603, "0603 SMD Testpoint"
L1: library part L_15nH_0402, "15 nH, 5%, 460mOhm, 2.3Ghz, 0402 chip inductor"
L2: library part L_10u_0603, "10uH, 10%, 32MHz, 468 mOhm, 0603, chip inductor"
Q1: "P-CHANNEL ENHANCEMENT MODE MOSFET"
R1: library part R_22k_0402, "22k 1% .063W 0402 resistor"
R2 R21: library part R_56K_0402, "56 kOhm, 1%, .0603 W, 0402"
R3: library part R_2.2K_0402, "Chip resistor, 2.2K, 0402 package"
R4 R5 R10 R11 R13: library part R_100K_0402, "Chip resistor, 100K, 0402 package"
R6: library part R_240_0402, "240 Ohm, 1%, .05W, 0402 Chip Resistor"
R7: library part R_1K_0402, "Chip resistor, 1K, 0402 package"
R8 R9 R12: library part R_1M_0402, "Chip resistor, 1M, 0402 package"
R14: library part R_1.24M_0402, "Chip resistor, 1.24M, 0402 package"
R15: library part R_37.4K_0402, "Chip resistor, 37.4K, 0402 package"
R16: library part R_40.2_0402, "40.2 Ohm 0402 1% Chip Resistor"
R17: library part R_422K_0402, "Chip resistor, 422K, 0402 package"
R18: library part R_60.4_0402, "60.4 Ohm, .05W, 1% 0402 Chip Resistor"
R19 R20: library part R_20K_0402, "20k ohm, 0402, 1%, .1W"
R22: library part R_0_0402, "Chip resistor, 0, 0402 package"
U1: "nrf8001 Bluetooth SPI module"
U2 U4: "UHS Dual Buffer with Schmitt Trigger Inputs"
U3: "cc2538 MCU/802.15.4 radio"
U5: "64 Mbit SPI Serial Dual I/O Flash"
U6: "IC VREF SERIES PREC SOT-23-3"
U7: "Ultralow Quiescent Current,  150 mA, CMOS Linear Regulators"
U8: "3 Dual-Input USB/AC Adapter 1-Cell Li+  Battery Chargers"
U9: library part IC_FT232RQ, "FT232R USB UART"
U10: "Micropower, 3-Axis, ±2 g/±4 g/±8 g  Digital Output MEMS Accelerometer"
U11: "Dual Ultra Low Power Op Amp in SOT23-8"
U12: "IC OPAMP 400KHZ 2.7V ULT LP SC70"
U13: "Rail-to-rail 1.1 V nanopower comparator"
U15: "IC ANALOG SWITCH SPDT 10XQFN"
U16: "1 uA supply current, 50 mA output current, Dual inverter"
UT1: "Ultrasonic piezoelectric transceiver, 40 khz,"
X1: library part TSX-3225, "3.2x2.5mm 16MHz SMD crystal"
X2: library part X_32M_FA-128, "32MHz, 10ppm, 10pF, 60 Ohm"
Y1: "Real Time Clock Module with I2C Bus"

## Free pads (board coordinates)
  rect 40x25 smd: 0(132,307) 1(132,267)

## Via types
v1: diameter 20, hole 8, Top Layer to Bottom Layer, 104 vias
v2: diameter 27, hole 13, Top Layer to Bottom Layer, 33 vias
v3: diameter 30, hole 14, Top Layer to Bottom Layer, 3 vias
v4: diameter 20, hole 10, Top Layer to Bottom Layer, 2 vias
v5: diameter 50, hole 32, Top Layer to Bottom Layer, 2 vias
v6: diameter 30, hole 15.75, Top Layer to Bottom Layer, tented top, 1 vias

## Nets (pads, with @x,y where several pads share a name; then routed paths per layer and width w, separated by ;. In a path a pad name is that pad's centre, name@x,y a point inside that pad or via, vN(x,y) a via of type N, cw(c..) or ccw(c..) an arc to the next point about the centre after c; other vN are vias at no path point)
ACCER_CS: U3.9 U10.8 | length 1063.3
  Top Layer w8: v1(371,25) 379,33 379,86.99 U3.9
  Signal Layer 2 w8: v1(371,25) 371,25.28 390.72,45 447,45 540,138 v1(895,138)
  Bottom Layer w8: v1(895,138) 895,142.85 1152.31,400.16 ; 1152.31,401.31 U10.8
ACCER_INT_1: U10.11
ACCER_INT_2: U3.8 U10.9 | length 1103.6
  Top Layer w8: v1(341,25) 359.84,43.84 U3.8
  Signal Layer 2 w8: v1(341,25) 341,26.72 359,44.72 359,90.84 435.16,167 889,167 v1(895,173)
  Bottom Layer w8: v1(895,173) 1120.32,398.32 U10.9
AMP1_OUT: C44.1 R8.2 U12.4 | length 85.3
  Bottom Layer w8: R8.2 C44.1 ; R8.2@691.31,899.41 U12.4
AMP2_IN: R9.1 R11.2 U11.6 | length 153.9
  Bottom Layer w8: U11.6 587.49,939.8 R11.2 588.28,896.43 R9.1
AMP2_OUT: C47.1 R9.2 U11.7 | length 198.4
  Bottom Layer w8: C47.1 466,895 485.2,914.2 U11.7 535.08,914.2 R9.2
AMP3_IN: R12.1 R13.1 U11.2 | length 192.6
  Bottom Layer w8: R12.1 U11.2@414.28,914.72 ; R13.1 405.28,834.72 451.36,880.8 451.36,910.64 447.8,914.2 U11.2
AMP3_OUT: R12.2 R15.1 U11.1 | length 113.2
  Bottom Layer w8: R15.1 332,850.28 R12.2 370.33,888.61 U11.1
BLE_ACTIVE: U1.6 U3.19 | length 886.4
  Top Layer w8: U3.19@505.48,195.79 U3.19 521.27,195.79 544,218.51 v1(544,227) ; v1@1178.06,142.94 U1.6
  Bottom Layer w8: v1(544,227) 544,131 560.5,114.5 621.22,114.5 652.72,83 767.47,83 798.96,114.5 982.96,114.5 1006.27,91.19 1131.81,91.19 1180.62,140 v1(1181,140)
BLE_ANT_N: B1.3 U1.22 | length 59.5
  Top Layer w8: B1.3 1119.84,424.11 1119.84,395.54 1119,394.7 U1.22
BLE_ANT_P: B1.4 U1.21 | length 59.5
  Top Layer w8: U1.21 1138.68,394.7 1137.84,395.54 1137.84,424.11 B1.4
BLE_RDYN: J6.1 R4.1 U1.16 U3.12 | length 1356.7
  Top Layer w8: U3.12 438.58,42.42 v1(456,25) ; U1.16 1247.94,359.94 v1(1278,390) R4.1 J6.1@1309.28,459.28
  Signal Layer 2 w8: v1(456,25) 481,50 532,50 568.5,86.5 1099.21,86.5 1172.72,160 1194,160 1238.06,204.06 1281.81,204.06 1332.37,254.63 1332.37,335.63 v1(1278,390)
BLE_REQN: J5.1 U1.12 U3.25 | length 970.1
  Top Layer w8: U3.25@505.48,313.9 U3.25@505.48,314 ; U3.25 545.9,313.9 v1(552,320) J5.1@603,320 ; U1.12 1247.94,267 1294,267 v1(1299,272)
  Signal Layer 2 w8: v1(552,320) 705.64,320 727.64,298 1006.72,298 1095,209.72 1201.57,209.72 1263.85,272 v1(1299,272)
BLE_RESET: U1.19 U3.29 | length 854.3
  Top Layer w8: U3.29 492.47,417 v1(506,417) ; U1.19 1178.06,396.94 1195.11,414 v1(1218,414)
  Signal Layer 2 w8: v1@506,422 v1(506,417) 517.72,417 537.72,437 554.28,437 582.28,409 1052.72,409 1073.72,430 1090.28,430 1106.28,414 v1(1218,414)
CC2538_RESET_N: C23.1 R3.1 U3.28 | length 183.4
  Top Layer w8: U3.28 557.72,423.19 622.28,423.19 R3.1 C23.1
CC2538_UBAL: ANT1.1 B2.1 | length 61.1
  Top Layer w12.95: B2.1 ANT1.1@283.05,607.67
CHG: D1.2 U8.3 | length 72.3
  Top Layer w8: U8.3 1139.61,793 D1.2
COMP1_IN: R14.1 R15.2 R17.1 U13.3 | length 123.8
  Bottom Layer w8: R14.1 R17.1 U13.3 ; U13.3@332,753.99 R15.2
COMP1_OUT: J7.1 R14.2 U3.45 U13.1 | length 631.7
  Top Layer w8: v1(130,347) 143.42,333.58 U3.45 ; v1(331,654) 334,654 J7.1
  Bottom Layer w8: v1(130,347) 119,358 119,482 287,650 R14.2 314.47,685.28 U13.1@331,701.81 ; v1@331.6,654.6 U13.1
DCOUPL2: C17.1 C21.1 U3.32 U3.56 | length 943.1
  Top Layer w8: v1@192.52,87.52 U3.56 ; U3.32 418.9,420.61 457.28,459 C21.1 502.28,476.74 520.81,495.27 520.81,565.81 v1(524,569)
  Signal Layer 2 w8: v1(192,87) 472,367 472,436.2 524,488.2 v1(524,569)
  Bottom Layer w8: v1(192,87) 200,95 C17.1
FLASH_CS: U3.30 U5.1 | length 201.4
  Top Layer w8: U3.30 458.27,423.27 472.19,437.19 556.19,437.19 574,455 v1(574,469)
  Bottom Layer w8: U5.1 559,499 574,484 v1(574,469)
FLASH_HOLD: U3.7 U5.7 | length 1369.7
  Top Layer w8: v1@340.16,54.16 U3.7
  Signal Layer 1 w8: v1(339,53) 501.49,215.49 501.49,323.49 451.62,373.36 451.62,598.38 543.69,690.46 883.62,690.46 936,638.08 936,560 v1(911,535)
  Bottom Layer w8: U5.7 897,549 v1(911,535)
FLASH_PWR: Q1.1 U3.11 | length 1030.2
  Top Layer w8: U3.11 418.9,32.1 v1(426,25)
  Signal Layer 1 w8: v1(426,25) 451,50 533.32,50 570.32,87 771.47,87 1035,350.53 1035,510 v1(1050,525)
  Bottom Layer w8: Q1.1@1009.81,525 v1(1050,525)
FLASH_WP: R5.2 U5.3 | length 498.6
  Bottom Layer w8: U5.3 587.89,626.4 587.89,672.63 593.75,678.49 902.23,678.49 R5.2
FTDI_DTR: U2.1 U9.31 | length 169.5
  Top Layer w8: U2.1 769.59,370.41 761.59,378.41 761.59,433.61 789.98,462 v1(791,462)
  Bottom Layer w8: U9.31 787.21,458.21 v1(791,462)
FTDI_RTS: U2.3 U9.32 | length 111.2
  Top Layer w8: U2.3 825.72,458 v1(836,458)
  Bottom Layer w8: U9.32 806.9,430.18 834.72,458 v1(836,458)
FTDI_RXD: U4.6 U9.2 | length 245.6
  Top Layer w8: U4.6 838.31,380.31 v1(887,429)
  Bottom Layer w8: U9.2 848.84,372.21 862.17,385.54 862.17,404.17 v1(887,429)
FTDI_TXD: U4.3 U9.30 | length 348.1
  Top Layer w8: v4(747,460) 747.59,460.59 747.59,372.39 767.45,352.54 786,352.54 810.59,327.94 810.59,279.59 768.41,237.41 U4.3
  Bottom Layer w8: v4(747,460) 757,460 767.53,449.47 U9.30
GND: B1.2 B2.2 B2.5 B2.6 C1.2 C2.2 C3.1 C4.2 C5.2 C6.2 C7.2 C8.2 C9.2 C10.2 C11.2 C12.2 C13.2 C14.2 C15.2 C16.2 C17.2 C18.2 C19.2 C20.2 C21.2 C22.1 C23.2 C24.1 C25.2 C26.2 C27.2 C28.2 C29.2 C30.2 C31.2 C32.2 C33.2 C34.2 C35.2 C36.2 C37.2 C38.2 C39.2 C40.2 C41.2 C42.2 C45.2 C46.2 C48.2 C49.2 C50.2 C51.2 C52.2 J1.5 J1.6 R1.2 R2.2 R17.2 R21.2 U1.8 U1.17 U1.18 U1.23 U1.30 U1.31 U1.33 U2.2 U3.1 U3.57 U4.2 U5.4 U5.9 U6.3 U7.2 U8.2 U9.4 U9.17 U9.20 U9.24 U9.26 U9.33 U10.12 U10.13 U10.16 U11.4 U12.2 U13.2 U15.4 U15.10 U16.2 X1.2 X1.4 Y1.3 | length 2213.4
  Top Layer w8: v1(25,380) 36,391 U16.2 ; U3.1 222.05,117.05 U3.57 ; C33.2 U4.2 765.83,263 779.41,276.57 779.41,284.41 ; X1.2@961.72,378.14 C3.1 ; U1.31 U1.33@1099.31,227.32 ; U1.30 U1.33@1119,247 ; U1.33@1099.31,325.74 U1.23 ; U1.33@1197.74,325.74 U1.18 ; U1.8 U1.33@1217.43,207.63 ; U1.33@1217.43,345.43 U1.17
  Top Layer w15: U8.2 1053,865 v5(1107,919)
  Bottom Layer w8: C16.2 234.06,187.72 v2(241.73,180.04) ; C40.2 447.28,767.28 455,775 478,775 506.28,803.29 C39.2 v1(506.28,858) ; v2(458.27,309.96) 486.53,309.96 C12.2 ; C36.2 C34.2 ; R21.2 611.61,391.9 U9.24 669.1,391.9 U9.33@688.79,372.21 ; U9.17 669.1,254.1 U9.33@728.16,313.16 ; U9.20 U9.33@728.16,313.16 ; U15.4 v1@676.5,837.5 ; v1(682,718) 686.37,718 U15.10 ; U9.26 U9.33@688.79,372.21 ; U9.33@747.84,332.84 U9.4 ; 774.72,954 C41.2 ; U12.2 v1@852,925 ; C32.2@906.72,919.57 C45.2 ; v1(1044,592) C38.2 ; U10.12 U10.13 C38.2@1120.32,588.55 ; U10.16 C37.2@1191.69,642.59 ; v2@1191.83,230.45 v2(1191.83,233.22) ; U9.33@688.79,372.21 v6(738,323) U9.33@728.16,313.16
  Bottom Layer w15: U7.2 1050,892 1077,919 v5(1107,919)
  other v1: 242,483 1060,484 1193,487 210,501 112,542 1044,559 140,582 363,622 1203,707 225,770 677,838 295,918 853,924
  other v2: 285.04,136.73 371.65,136.73 458.27,136.73 328.35,180.04 414.96,180.04 285.04,223.35 371.65,223.35 458.27,223.35 1105.22,233.22 241.73,266.65 328.35,266.65 414.96,266.65 1148.53,276.53 285.04,309.96 371.65,309.96 1105.22,319.83 1191.83,319.83 241.73,353.27 328.35,353.27 414.96,353.27 629.39,509.04 716,509.04 802.61,509.04 672.69,552.35 759.31,552.35 629.39,595.65 716,595.65 802.61,595.65 672.69,638.96 759.31,638.96
I2C_SCL: J9.1 R20.2 U3.14 Y1.8 | length 1218
  Top Layer w8: U3.14 477.95,65.05 518,25 v1(519,25) ; J9.1 1017.37,18.63 1175.63,18.63 1193.8,36.8 Y1.8 1197.38,44.38 v1(1229,76)
  Bottom Layer w8: v1(519,25) 518.16,25.84 518.16,34.84 569.81,86.5 604.19,86.5 635.68,55 788.32,55 819.81,86.5 852.19,86.5 923.68,15 1003.28,15 ; R20.2 1003.28,15 ; v1@1224.59,80.41 v1(1229,76) 1168,15 1003.28,15
I2C_SDA: J8.1 R19.2 U3.13 Y1.1 | length 1057.2
  Top Layer w8: U3.13 458.27,55.25 v1(488.52,25) ; J8.1 928,45 v1(948,65) ; Y1.1 1211,108.82 v1(1211,128)
  Bottom Layer w8: v1(488.52,25) 564.01,100.5 609.99,100.5 641.48,69 773.26,69 804.76,100.5 977.16,100.5 1000.47,77.19 ; v1(948,65) 960.19,77.19 1000.47,77.19 ; v1(1211,128) 1160.19,77.19 1000.47,77.19 ; v1@1214,131 R19.2
JTAG_TCK: pad.1 U3.47 | length 71.8
  Top Layer w8: pad.1 152,267 179.21,294.21 U3.47
JTAG_TMS: pad.0 U3.46 | length 63.4
  Top Layer w8: pad.0 138.9,313.9 U3.46
LED_BLUE: D3.3 R18.1 | length 46.6
  Top Layer w8: R18.1 1007,1011 D3.3 D3.3@1027.73,985.73
LED_BLUE_PIN: R18.2 U3.54 | length 1351.3
  Top Layer w8: v1(142,177) 154,177 174.58,156.42 U3.54 ; v1(858,890) 873,905 873,969 920,1016 965.28,1016 R18.2
  Signal Layer 2 w8: v1(142,177) 193,177 471,455 471,589.72 771.28,890 v1(858,890)
LED_GREEN: D3.4 R16.1 | length 66.2
  Top Layer w8: D3.4 v1@1065.73,1016.73
  Bottom Layer w8: R16.1 1040.72,1017 v1(1066,1017)
LED_GREEN_PIN: R16.2 U3.44 | length 1340.9
  Top Layer w8: v1(152,366) 164.73,353.27 U3.44
  Signal Layer 2 w8: v1(152,366) 221.23,366 232,376.77 303.77,376.77 425,498 425,806 617,998 929,998 v1(931,996)
  Bottom Layer w8: v1(931,996) 945,1010 R16.2
LED_RED: D3.2 R6.1 | length 80.1
  Top Layer w8: R6.1 1025.54,959 D3.2 D3.2@1032.27,954
LED_RED_PIN: R6.2 U3.5 | length 1284.8
  Top Layer w8: v1(283,25) 283,51.28 300.79,69.07 U3.5 ; v1(887,866) 887,924.72 R6.2
  Signal Layer 2 w8: v1(283,25) 283,88 486,291 486,425.28 604.36,543.64 604.36,611.64 858.72,866 v1(887,866)
NetB1_5: B1.5 C8.1 U1.20 | length 146.6
  Top Layer w8: B1.5 C8.1@1199.76,451.53 ; U1.20 1158.37,409.09 C8.1
NetC1_1: C1.1 U1.28 X1.1 | length 145.6
  Top Layer w8: C1.1 969.02,264.31 X1.1 ; X1.1@971.17,286.37 U1.28
NetC3_2: C3.2 U1.27 X1.3 | length 237.3
  Top Layer w8: C3.2 906.03,408.75 X1.3 906.03,369.49 942.24,333.28 984.31,333.28 1011.53,306.06 U1.27
NetC6_1: C6.1 U1.2 | length 83
  Top Layer w8: v1(1079,141) 1079,145.95 1099.31,166.27 U1.2
  Bottom Layer w8: C6.1 1079,138.28 v1(1079,141)
NetC7_1: C7.1 U1.3 | length 70.1
  Top Layer w8: v1(1119,141) U1.3
  Bottom Layer w8: v1(1119,141) C7.1
NetC43_2: C43.2 R10.1 | length 41
  Bottom Layer w8: C43.2 R10.1
NetC44_2: C44.2 R11.1 | length 31.6
  Bottom Layer w8: R11.1 C44.2
NetC47_2: C47.2 R13.2 | length 67
  Bottom Layer w8: R13.2 C47.2
NetD1_1: D1.1 R7.2 | length 42
  Top Layer w8: R7.2 D1.1
NetL1_2: L1.2 L2.1 | length 44.8
  Top Layer w8: L2.1@928.53,109.06 L1.2
NetL2_2: L2.2 U1.32 | length 124.1
  Top Layer w8: L2.2 987.53,126.53 1049.12,188.12 U1.32
NetR1_1: R1.1 U1.25 | length 62.8
  Top Layer w8: U1.25 R1.1@1049.12,408.22
NetR2_1: R2.1 U3.42 | length 69.5
  Top Layer w8: R2.1 183.53,439 U3.42@220.05,402.48
NetR8_1: R8.1 R10.2 U12.3 | length 198.1
  Bottom Layer w8: R8.1 679.28,876 784,876 ; R10.2 783.28,875.28 784,876 ; U12.3 807.41,899.41 784,876
NRF8001_BALUN: ANT2.1 B1.1 | length 63.6
  Top Layer w12.95: B1.1 ANT2.1
NRF_AVDD: C2.1 C4.1 L1.1 R22.2 U1.24 U1.26 U1.29 | length 784
  Top Layer w8: L1.1 964.53,189.24 C2.1 992,235 1023.68,266.69 U1.29 ; v1(963,152) 963,187.72 ; C4.1@1014.53,416.81 v1(1014.53,369.53) 1014.53,349.48 1038.27,325.74 U1.26 ; U1.24 1079.63,407.63 v1(1082,410)
  Signal Layer 1 w8: v1(963,152) 1081.72,270.72 1081.72,409.72 v1(1082,410)
  Bottom Layer w8: v1(963,152) 981.28,170.28 R22.2 ; v1(1014.53,369.53) 1041.53,369.53 v1(1082,410)
OP_IN: C43.1 U15.6 | length 38.3
  Bottom Layer w8: U15.6 C43.1@777.81,808.53
PWM: U3.52 U16.3 | length 256.2
  Top Layer w8: U16.3 57.24,327.44 84.23,300.45 84.23,262.03 126.26,220 150.6,220 174.81,195.79 U3.52
RF_N: B2.3 U3.38 | length 101
  Top Layer w8: B2.3 301.63,476.83 301.63,423.07 300.79,422.23 U3.38
RF_P: B2.4 U3.37 | length 101
  Top Layer w8: U3.37 320.47,422.23 319.63,423.07 319.63,476.87 B2.4
ROM_CONTROL: U2.6 U3.18 | length 286.2
  Top Layer w8: U3.18 526.3,176.1 702.69,352.49 U2.6
ROM_RESET: R3.2 U2.4 | length 47.6
  Top Layer w8: R3.2 664.13,421.59 U2.4
ROM_UART_RXD: U3.16 U4.4 | length 417.1
  Top Layer w8: U3.16 519.32,136.73 533.23,122.82 533.23,100.77 v4(534,100) ; v1(790,187) 838.31,235.31 U4.4
  Signal Layer 1 w8: v4(534,100) 535,101 704,101 v1(790,187)
ROM_UART_TXD: U3.17 U4.1 | length 301.3
  Top Layer w8: U3.17@505.48,156.42 U3.17 526.42,156.42 659,289 751.28,289 U4.1
RTC_CLKOUT: U1.5 Y1.2 | length 85.5
  Top Layer w8: Y1.2 U1.5
SPI_MISO: J2.1 U1.14 U3.27 U5.2 U10.7 | length 1456.3
  Top Layer w8: U3.27@505.48,353.27 U3.27 519.32,353.27 533.23,367.18 ; 533.23,367.23 v1(551,385) ; U1.14 1266.06,306.06 v1(1299,339) 1322,339 J2.1
  Signal Layer 1 w8: v1(524,599) 551,572 v1(551,385) v1@544,385
  Signal Layer 2 w8: v1@555.53,389.53 v1(551,385) 553,385 563,395 1068.72,395 1073.72,390 1248,390 v1(1299,339)
  Bottom Layer w8: v1(524,599) 560.49,562.51 U5.2 U5.2@559,549 ; U10.7 1172,417 1250,339 v1(1299,339)
SPI_MOSI: J3.1 U1.13 U3.26 U5.5 U10.6 | length 2009.5
  Top Layer w8: U3.26@505.48,333.58 U3.26 534.58,333.58 v1(552,351) ; v1(902,624) 943,583 J3.1 ; U1.13 1281.37,286.37 v1(1302,307)
  Signal Layer 1 w8: 480,414.72 543.72,351 v1(552,351) ; 480,415 480,587.17 555.29,662.46 863.54,662.46 v1(902,624)
  Signal Layer 2 w8: v1(552,351) 553.47,349.53 1259.47,349.53 v1(1302,307)
  Bottom Layer w8: U5.5 877,649 v1(902,624) ; U10.6 1191.69,455.31 1213,434 1269,434 1319,384 1319,324 v1(1302,307)
SPI_SCK: J4.1 U1.11 U3.22 U5.6 U10.4 | length 2275.5
  Top Layer w8: U3.22@505.48,254.84 U3.22 548.84,254.84 v1(552,258) ; v1(902,574) 944,532 J4.1 ; U1.11 1279,247 v1(1287,239)
  Signal Layer 1 w8: v1(552,258) 515.49,294.51 515.49,329.28 466,378.77 466,592.97 549.49,676.46 877.82,676.46 922,632.28 922,594 v1(902,574)
  Signal Layer 2 w8: v1(552,258) 838.28,258 900.56,195.72 1207.37,195.72 1250.65,239 v1(1287,239)
  Bottom Layer w8: U5.6 896.51,574 v1(902,574) ; U10.4 1233.49,489.31 1333,389.8 1333,275 1297,239 v1(1287,239)
TX_1: U15.1 U16.6 | length 854.6
  Top Layer w8: U16.6 v1@86.76,445.76
  Signal Layer 1 w8: v1(87,446) 446,805 609,805 641,773 v1(641,718)
  Bottom Layer w8: v1(641,718) 672.47,749.47 U15.1
TX_2: U15.9 U16.1 U16.4 | length 1094.5
  Top Layer w8: U16.1@56,411.92 v1(56,446) ; v1(78,340) 78,362.55 U16.4
  Signal Layer 1 w8: v1(78,340) 56,362 v1(56,446) 429,819 638,819 v1(739,718)
  Bottom Layer w8: v1@739.5,718.5 U15.9
TXRX_SELECT: U3.6 U15.2 U15.8 | length 1112.3
  Top Layer w8: v1(313,25) 313,57 320.47,64.47 U3.6
  Signal Layer 1 w8: v1(313,25) 313,130.69 481.77,299.46 481.77,319.69 437.62,363.85 437.62,604.18 537.89,704.46 569,704.46 614,749.46 v1(614,765)
  Bottom Layer w8: v1(614,765) 618.16,769.16 U15.2 U15.8
UL1: U15.3 UT1.1 | length 142.3
  Bottom Layer w8: UT1.1@548.61,754 583.46,788.84 U15.3
UL2: U15.7 UT1.2 | length 150.5
  Top Layer w8: UT1.2@875.23,753.84 UT1.2@875.39,754
  Bottom Layer w8: U15.7 840.54,788.84 UT1.2@875.39,754
USB_D_N: J1.2 U9.15 | length 79.3
  Top Layer w8: v1(686,192) 686.41,191.59 J1.2
  Bottom Layer w8: v1(686,192) v1@688.79,194.79 ; U9.15 v1@688.79,194.79 ; v1@690,196 v1@688.79,194.79
USB_D_P: J1.3 U9.14 | length 77.7
  Top Layer w8: J1.3 v1(712,192)
  Bottom Layer w8: U9.14 708.47,195.53 v1(712,192)
VBAT: C28.1 C32.1 U7.1 U7.3 U8.5 | length 413.5
  Top Layer w15: v5(995,919) 1015.6,898.4 U8.5
  Bottom Layer w15: C32.1 v5(995,919) 1012.6,901.4 U7.1 ; C28.1 U7.1 ; U7.3 1087.4,828.4 1070,811 1023,811 1012.6,821.4 U7.1
VBUS: C31.1 C35.1 FB1.2 J1.1 U8.1 | length 897.7
  Top Layer w8: v1(654,193) 660.82,186.18 J1.1 ; C31.1@1015.6,675.69 U8.1 ; v1@1016.28,623.28 C31.1
  Signal Layer 1 w8: v1(654,193) 857,396 857,450.72 950,543.72 950,557 v1(1016,623)
  Bottom Layer w8: v1(654,193) 693.72,153.28 FB1.2 722.28,113 C35.1
VCC3.3: C5.1 C9.1 C10.1 C11.1 C12.1 C13.1 C14.1 C15.1 C16.1 C18.1 C19.1 C25.1 C26.1 C29.1 C30.1 C37.1 C38.1 C39.1 C40.1 C41.1 C42.1 C49.1 C50.1 C51.1 D3.1 Q1.2 R4.2 R19.1 R20.1 R22.1 U1.1 U1.9 U3.10 U3.15 U3.24 U3.33 U3.36 U3.39 U3.40 U3.41 U3.43 U3.55 U6.1 U7.5 U10.1 U10.14 U11.8 U12.5 U13.5 U15.5 U16.5 Y1.5 | length 2949.7
  Top Layer w8: U16.5 v1(162,391) 180.05,372.95 U3.43@190.52,372.95 ; v1@156.51,148 167.78,136.73 U3.55@190.52,136.73 ; v1(229,441) 241.73,428.27 U3.41 U3.40 U3.39 ; C25.1@319.13,823.6 U6.1 ; U3.36 340.16,450.16 v1(361,471) ; v1(399,25) U3.10@399,87.31 ; U3.33 399.21,430.21 v1(411,442) ; U6.1@401.72,820.28 C26.1 401.72,676.28 v1(405,673) ; v1(502,70) 502,111.57 U3.15 ; U3.24 546.79,294.21 v1(552,289) ; v1(1040,921) 1065.73,946.73 D3.1 ; v1(1047,41) Y1.5@1084.13,41 ; v1(1052,159) 1070.12,177.12 U1.1 ; v1@1247.94,169.06 U1.9 ; R4.2 v1@1344.72,422.72
  Bottom Layer w8: v1@156.51,148 160.8,152.28 C16.1 ; v1(162,391) 198,355 C15.1 ; C19.1 v1(229,441) 257.26,441 294.28,403.98 C18.1 ; C13.1 v1(361,471) ; v1(399,25) C10.1@399,85.76 ; U13.5 405,701.01 v1(405,673) 407.72,673 C49.1 C50.1 ; v1(411,442) 439.28,413.72 C14.1 ; C40.1 482.72,759.92 541.72,818.92 C39.1 v1(541.72,858) 541.72,860.11 U11.8 ; v1(502,70) 502,123.28 C11.1 ; C12.1 547,294 v1(552,289) ; U15.5 v1(708,855) ; U12.5 737.6,989.88 C41.1@775.17,989.88 ; C41.1 797.09,1011.81 886.9,1011.81 922.72,976 987.5,976 1040,923.5 v1(1040,921) ; v1(968,462) 979.41,473.41 Q1.2 ; C29.1 1062.79,613.81 1130.5,613.81 C38.1 U10.14 1152.31,552.93 1162.94,542.31 1200.75,542.31 1206.83,548.38 U10.1 C37.1@1223.67,641.96 ; R20.1 v1(1047,41) 1082.28,41 C51.1 ; R22.1 1055,191 1055,162 v1(1052,159) ; R19.1 C9.1@1247.94,228.65 ; v1@1247.94,169.06 C9.1@1247.94,228.65 ; C9.1 C9.1@1247.94,228.65
  Bottom Layer w15: C29.1 C30.1 U7.5
  other v1: 154,148 1248,169 1345,423
  other v3: 955,675 960,730 965,784
VCC3.3-USB: C33.1 R7.1 R21.1 U2.5 U3.53 U4.5 U9.1 U9.16 | length 2146.7
  Top Layer w8: v1(128,200) 150.8,200 174.7,176.1 U3.53 ; C33.1 662,263 641,242 v1(641,224) 645.46,219.54 775.54,219.54 819,263 U4.5 ; v1(699,459) 705.02,459 730.41,433.61 730.41,404.41 722,396 U2.5 ; v1@1142.28,711.28 R7.1
  Signal Layer 1 w8: v1(641,224) 641,261.36 727.64,348 753,348 v1(836,431)
  Signal Layer 2 w8: v1(699,459) 727,431 v1(836,431) 852.28,431 v1@1132.28,711
  Bottom Layer w8: v1(128,200) 133.59,205.59 249.42,205.59 255.16,199.85 314.92,199.85 448.53,333.46 471.18,333.46 584.89,447.17 687.17,447.17 v1(699,459) ; R21.1 588,444.06 ; v1@641.57,224.57 U9.16 ; U9.1 v1@836.43,430.57
  other v1: 1142,711
VCC_FLASH: C24.2 Q1.3 R5.1 U5.8 | length 173.4
  Bottom Layer w8: U5.8 Q1.3 ; Q1.3@935.28,499.69 C24.2 R5.1
VREF: C27.1 C45.1 C46.1 C48.1 C52.1 U6.2 U11.3 U11.5 U12.1 U13.4 | length 1160.1
  Top Layer w8: C48.1@330.28,946 v1(364,946) C27.1@415.47,946 ; v1(445,720) 445,851.8 U6.2 398.4,924.93 C27.1 449.47,976 841,976 v1(843,978)
  Bottom Layer w8: v1(364,946) 370.2,939.8 U11.3 435.8,939.8 461.39,965.39 U11.5 532.83,985 C46.1 ; U13.4 v1@439.99,720 ; v1(445,720) 447.28,717.72 C52.1 ; U12.1 816.59,950.59 816.59,951.59 v1(843,978) 851.28,978 C45.1
VUSB: C34.1 C36.1 FB1.1 U9.19 | length 232
  Bottom Layer w8: C34.1 609.72,284.72 618.47,293.47 U9.19 ; C34.1@611.51,190.2 611.51,144 642.51,113 FB1.1
XOSC32M_Q1: C22.2 U3.34 X2.3 | length 182.4
  Top Layer w8: U3.34 379.53,438.81 402.72,462 427.48,462 X2.3@453.64,488.16 ; X2.3 468.46,507.28 C22.2
XOSC32M_Q2: C20.1 U3.35 X2.1 | length 221.5
  Top Layer w8: U3.35 359.84,439.64 381.63,461.43 381.63,522.81 X2.1 C20.1@408.36,603.92
pads on no net: ANT1.2 ANT1.3 ANT1.4 ANT2.2 ANT2.3 ANT2.4 B1.6 J1.4 U1.4 U1.7 U1.10 U1.15 U3.2 U3.3 U3.4 U3.20 U3.21 U3.23 U3.31 U3.48 U3.49 U3.50 U3.51 U7.4 U8.4 U9.3 U9.5 U9.6 U9.7 U9.8 U9.9 U9.10 U9.11 U9.12 U9.13 U9.18 U9.21 U9.22 U9.23 U9.25 U9.27 U9.28 U9.29 U10.2 U10.3 U10.5 U10.10 U10.15 X2.2 X2.4 Y1.4 Y1.6 Y1.7

## Polygon pours and split planes (outlines as drawn)
GND on Ground Plane "GND Plane" (solid, pour order 8): 212,0 1212,0 1424,381 1096.4,1040 326.85,1040 0,381
VCC3.3 on Power Plane "VCC3.3 Plane" (solid, pour order 10): 212,0 1212,0 1424,381 1096.4,1040 326.85,1040 0,381
VCC3.3 on Bottom Layer "Bot VCC Plane" (solid, pour order 5): 919,825 919,640 1039,640 1039,825
GND on Bottom Layer "Bot Gnd Plane" (solid, pour order 12): 212,0 1212,0 1424,381 1096.4,1040 326.85,1040 0,381
GND on Top Layer "Top Gnd Plane" (solid, remove dead copper, pour order 6): 212,0 1212,0 1424,381 1096.4,1040 326.85,1040 0,381

## Keep-outs
Keep-Out Layer:
  the board outline again, w10

## Other copper
Top Layer:
  pour cut-out: 1081,643 1081,503 1221,503 1221,643
  pour cut-out: 175,715 175,576 315,576 315,715
Ground Plane:
  pour cut-out: 1081,643 1081,503 1221,503 1221,643
  pour cut-out: 175,715 175,576 315,576 315,715
Power Plane:
  pour cut-out: 1081,643 1081,503 1221,503 1221,643
  pour cut-out: 175,715 175,576 315,576 315,715
Bottom Layer:
  pour cut-out: 1081,643 1081,503 1221,503 1221,643
  pour cut-out: 175,715 175,576 315,576 315,715

## Silkscreen, mask and mechanical layers (free items; w line width, h text height)
Top Overlay:
  circle w10: c35,411 r1
  circle w10: c1052,130 r3.61
Bottom Overlay:
  circle w10: c867,392 r2.24
  circle w10: c1026.83,555 r2.83
  circle w10: c813,880 r1.41
  circle w10: c333.83,678 r2.83